# Altium PCB VSC_PCB.PcbDoc (part 1 of 2)
Units mil, origin at the board's own origin, x right, y up, seen from the top; angles counter-clockwise.
Board outline 9964.56 x 7010.83 mil, 4 copper layers (Top Layer, Regulator Voltage, Regulator GND, Bottom Layer), stack 23.756 mil thick; 128 components, 80 nets, 378 pads, 666 vias.
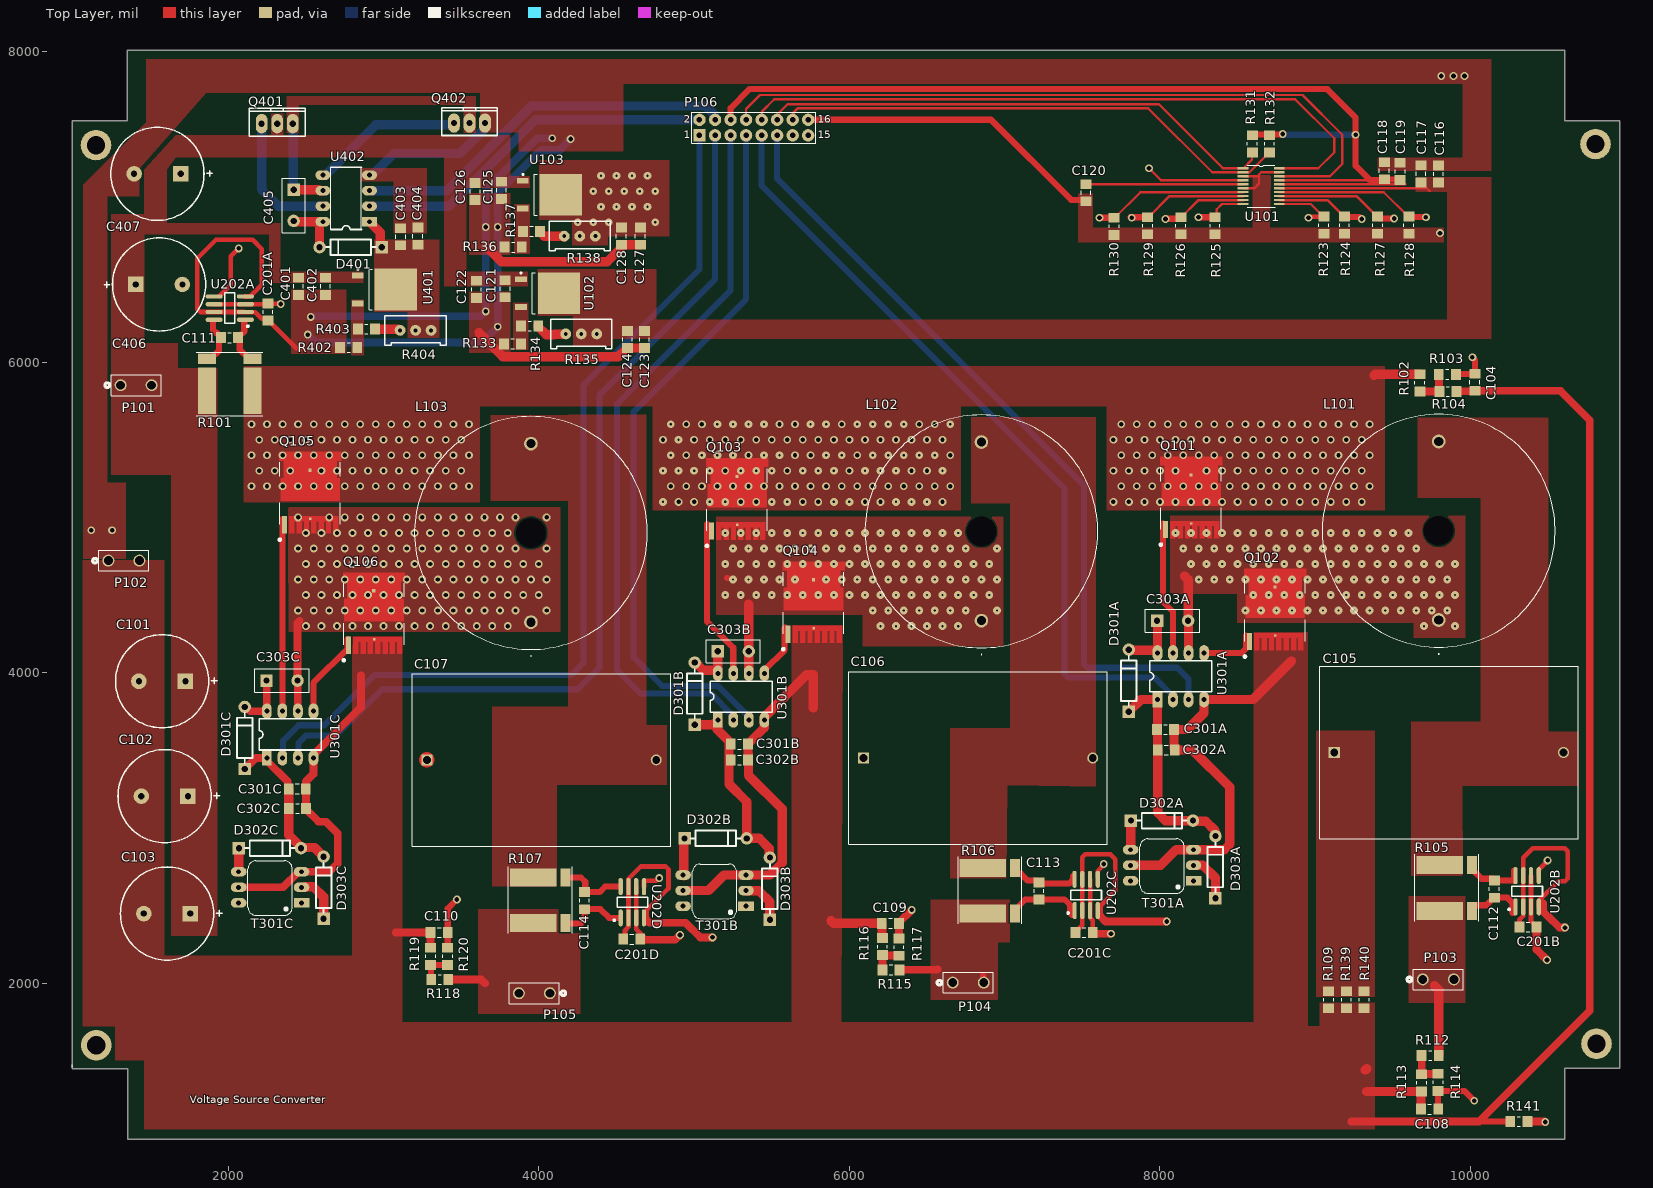
[diagram p0: Top Layer view]
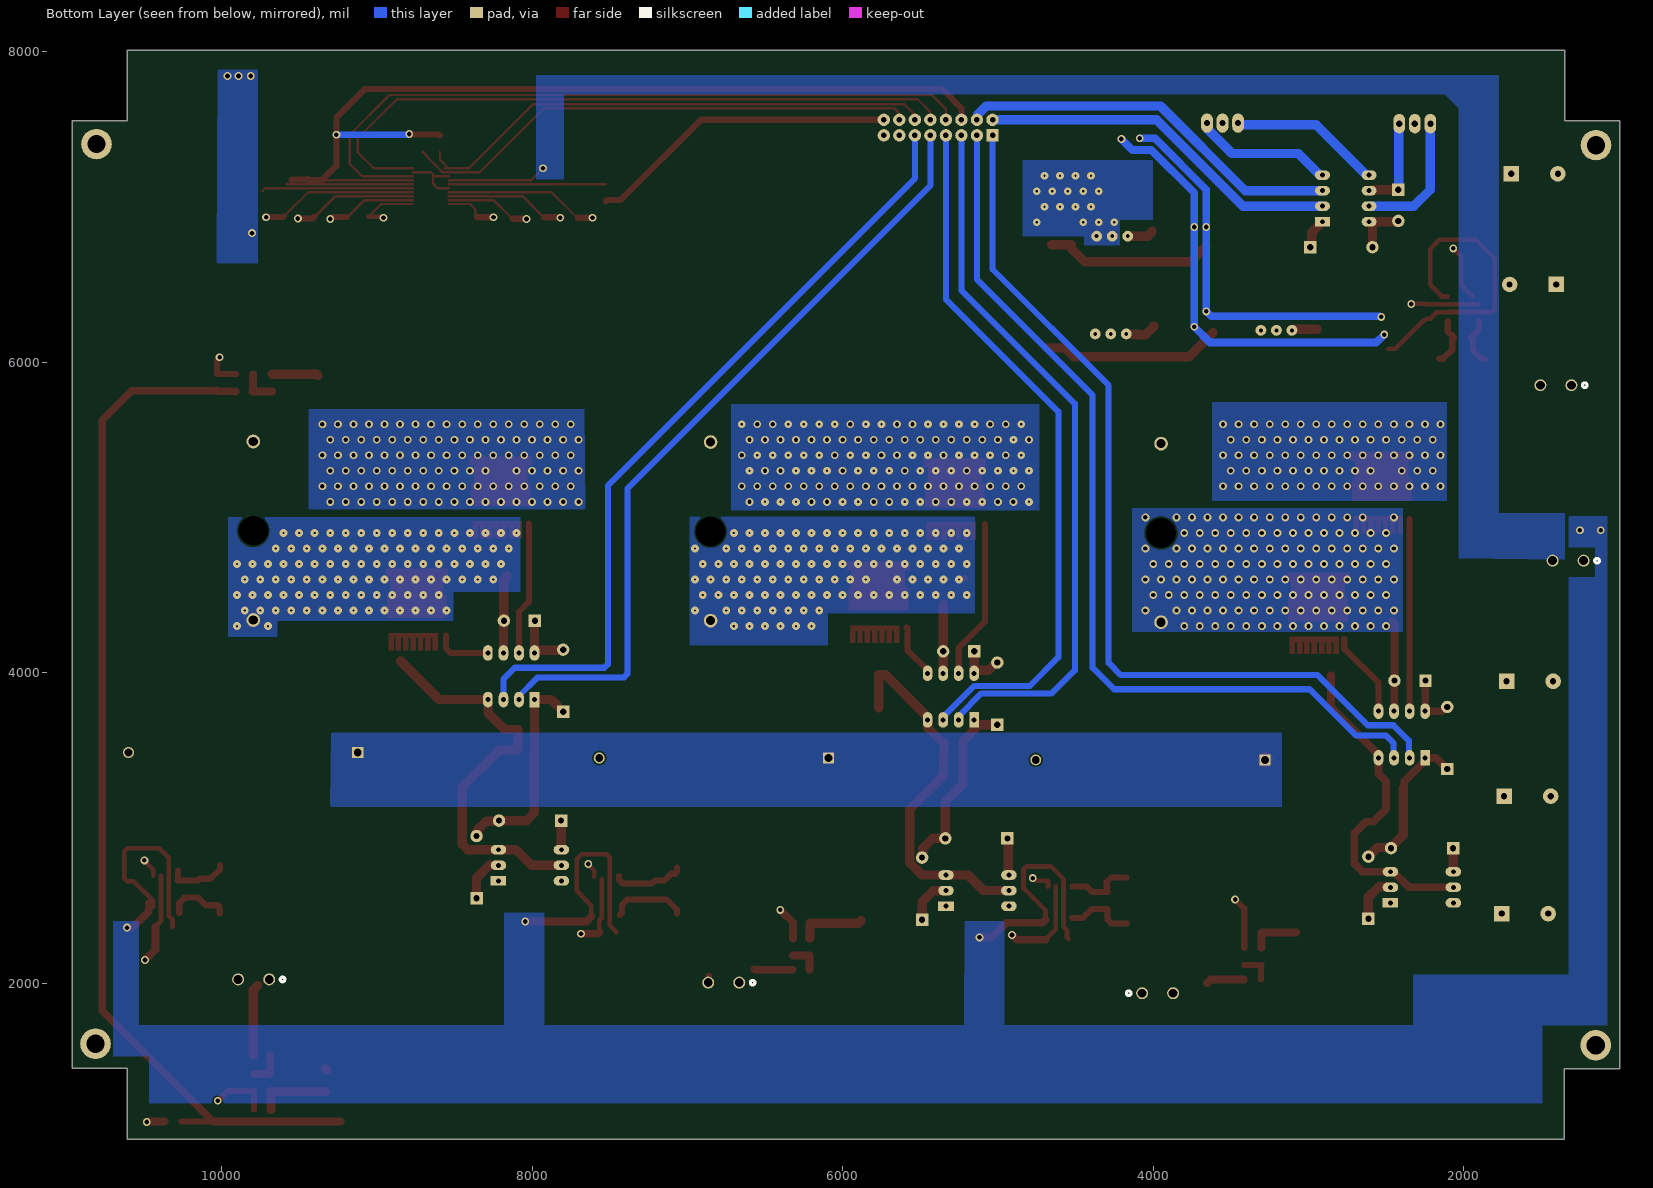
[diagram p1: Bottom Layer view, seen from below]
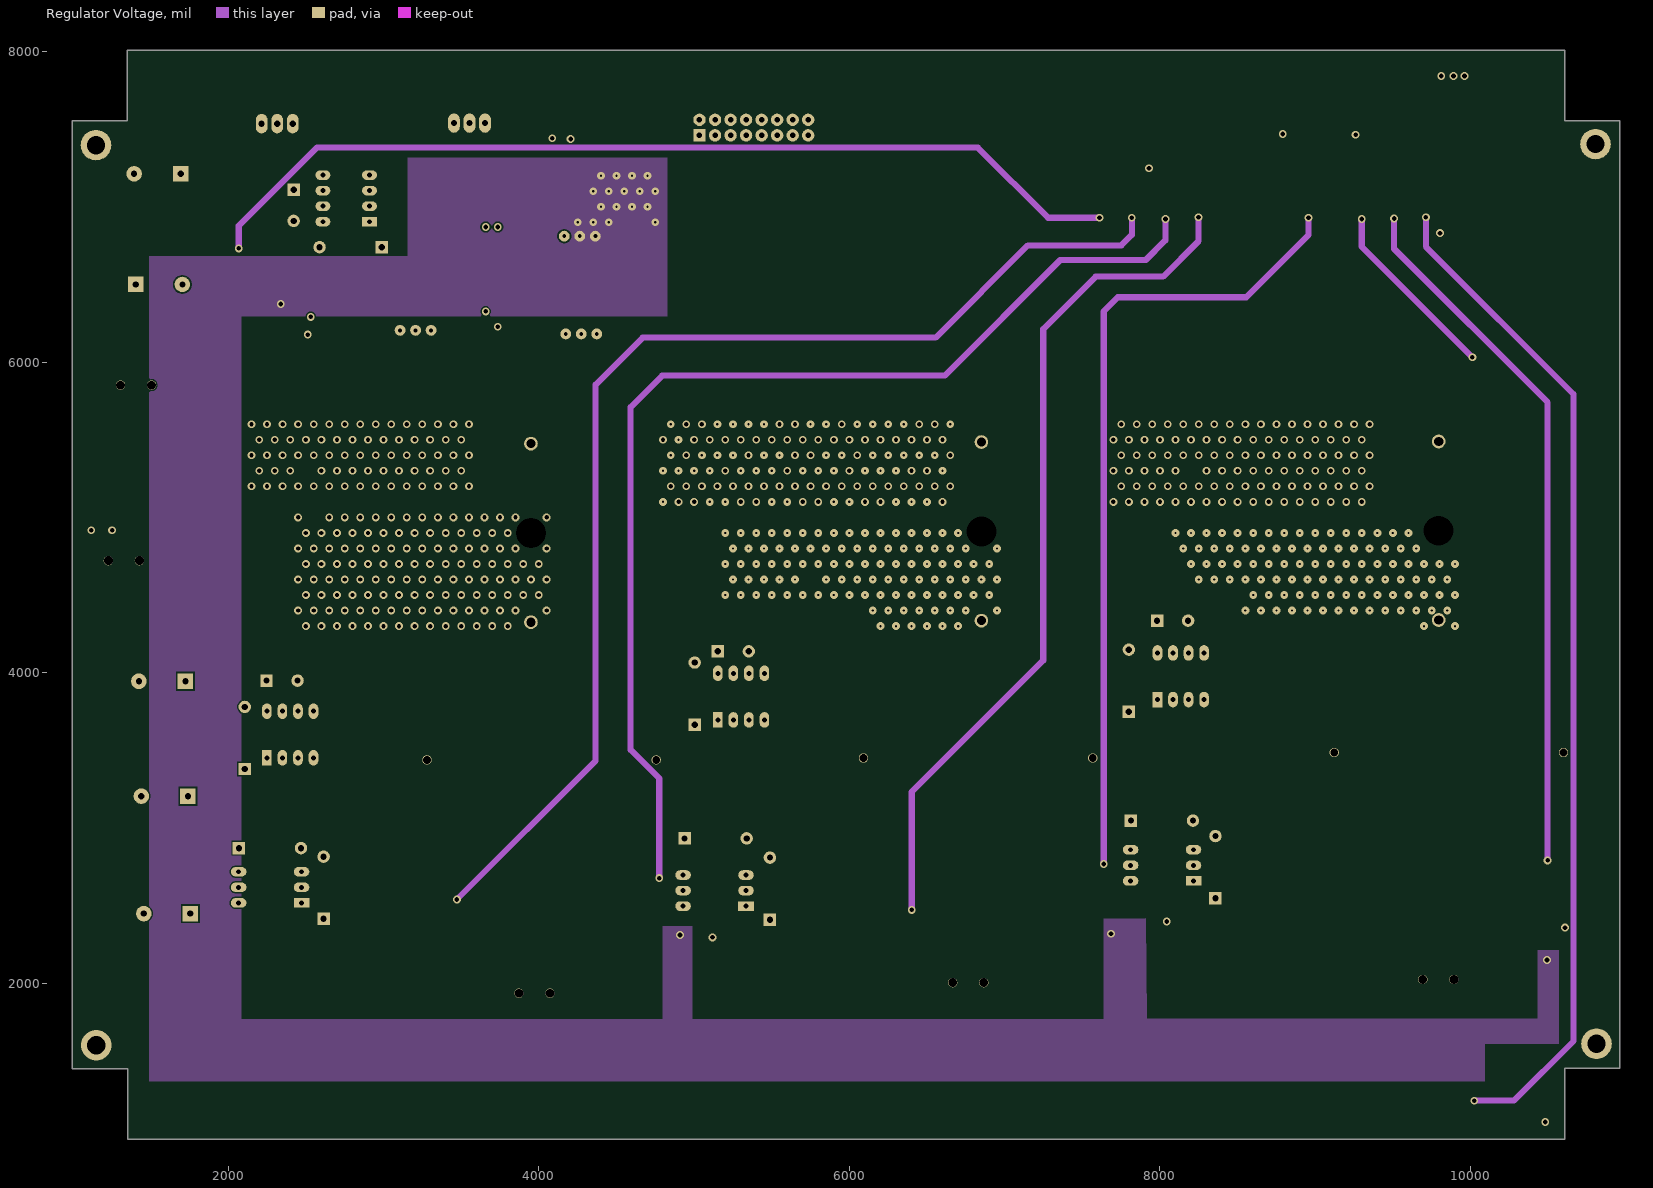
[diagram p2: Regulator Voltage]
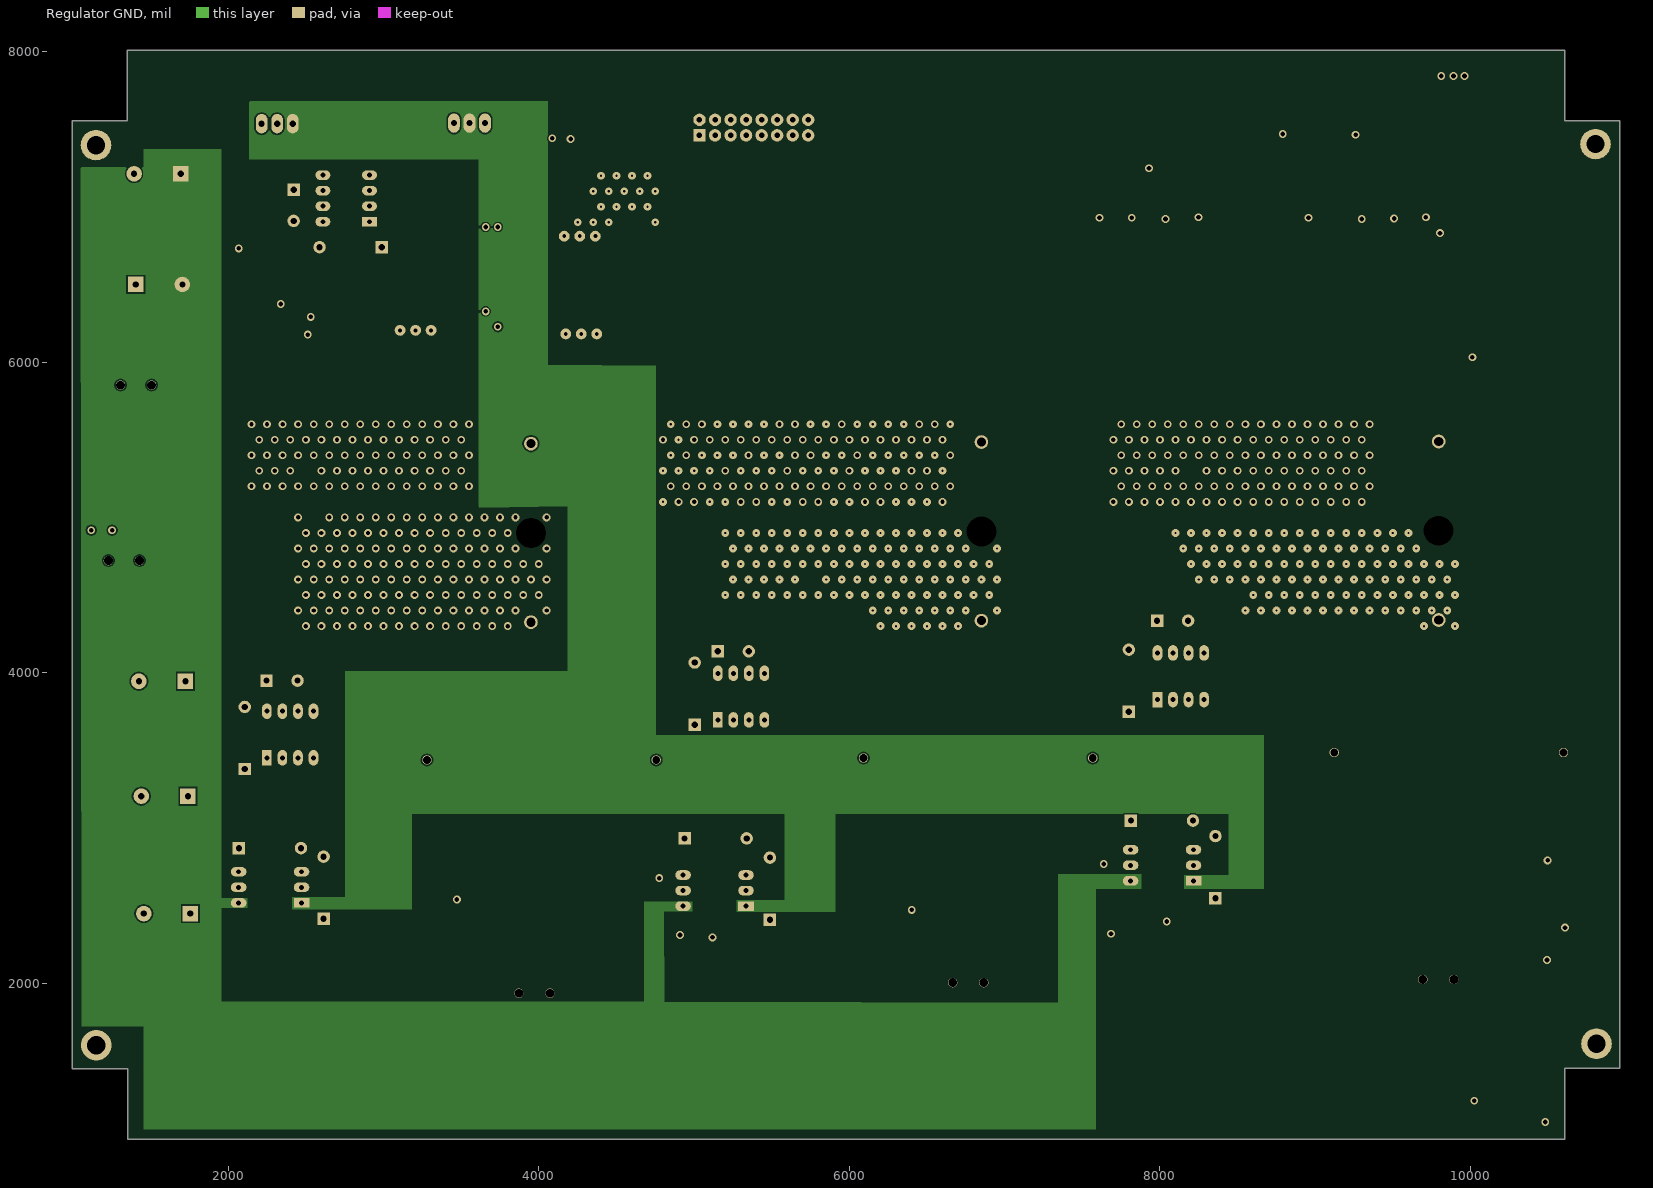
[diagram p3: Regulator GND]
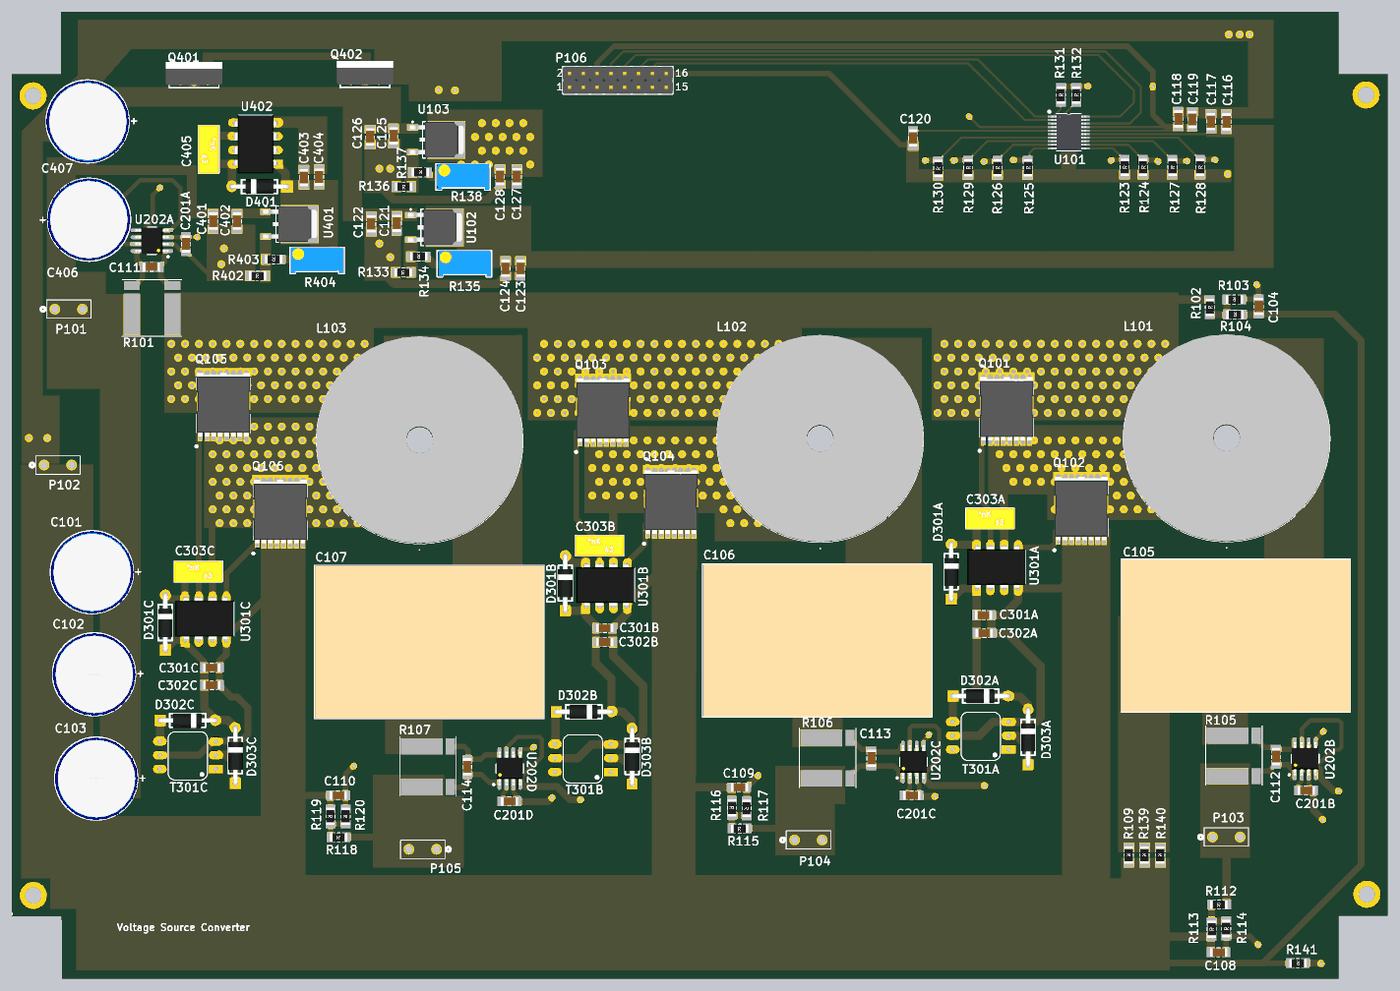
[diagram p5: 3D render of the assembled board from above, using the file's embedded part models]

## Layer stack, top to bottom
Top Solder: solder mask 0.4, Solder Resist, Dk 3.5
Top Layer: signal copper 1.4
Dielectric 6: prepreg 2.8, PP-006, Dk 4.1
Regulator Voltage: signal copper 1.378
Dielectric 1: dielectric 12.6, FR-4, Dk 4.8
Regulator GND: signal copper 1.378
Dielectric 7: prepreg 2.8, PP-006, Dk 4.1
Bottom Layer: signal copper 1.4
Bottom Solder: solder mask 0.4, Solder Resist, Dk 3.5

## Board outline
995.83,1449.8 995.83,7555.12 1350.16,7555.12 1349.17,8007.87 10606.3,8007.87 10606.3,7555.16 10960.39,7555.16 10960.39,1452.79 10606.06,1452.79 10606.06,997.29 10606.3,997.05 1354.09,997.05 1354.09,1449.8

## Design rules (kind name [scope] priority, off if disabled: settings)
Clearance "Stitching HS-3" [IsStitchingVia and InNet('HS-3') vs (IsVia and (Not IsStitchingVia)) Or IsPad] p1: gap=5 ignorepadtopadclearanceinfootprint=FALSE
Clearance Clearance_1 [InNamedPolygon('NONET_L01_P035')] p2: gap=10 ignorepadtopadclearanceinfootprint=TRUE
Clearance [All] p3: gap=10 ignorepadtopadclearanceinfootprint=TRUE
Height [All] p1: minheight=0 maxheight=10000 prefheight=500
HoleSize [All] p1: absolutevalues=TRUE maxlimit=393.7 minlimit=1 maxpercent=80.000 minpercent=20.000
PolygonConnect PolygonConnect_67 [All vs IsNamedPolygon('NONET_L06_P-001') Or IsNamedPolygon('NONET_L06_P-001') Or IsNamedPolygon('NONET_L06_P-001') Or IsNamedPolygon('NONET_L06_P-001') Or IsNamedPolygon('NONET_L06_P-001') Or IsNamedPolygon('NONET_L-01_P-001') Or IsNamedPolygon('NONET_L06_P-001') Or IsNamedPolygon('NONET_L06_P-001') Or IsNamedPolygon('NONET_L06_P-001') Or IsNamedPolygon('NONET_L06_P-001') Or IsNamedPolygon('NONET_L06_P-001') Or IsNamedPolygon('NONET_L-01_P-001') Or IsNamedPolygon('GND_L01_P084') Or IsNamedPolygon('HS-1_L01_P104') Or IsNamedPolygon('HS-2_L01_P099') Or IsNamedPolygon('HS-3_L01_P083') Or IsNamedPolygon('NETC105_2_L01_P112') Or IsNamedPolygon('NETC106_2_L01_P107') Or IsNamedPolygon('NETC107_2_L01_P088') Or IsNamedPolygon('NETP103_1_L01_P110') Or IsNamedPolygon('NETP104_1_L01_P108') Or IsNamedPolygon('NETP105_1_L01_P089') Or IsNamedPolygon('NETQ101_3_L01_P082') Or IsNamedPolygon('NONET_L-01_P-001') Or IsNamedPolygon('NONET_L-01_P-001') Or IsNamedPolygon('NONET_L-01_P-001') Or IsNamedPolygon('NONET_L-01_P-001') Or IsNamedPolygon('NONET_L-01_P-001') Or IsNamedPolygon('NONET_L-01_P-001') Or IsNamedPolygon('NONET_L-01_P-001') Or IsNamedPolygon('NONET_L-01_P-001') Or IsNamedPolygon('NONET_L-01_P-001') Or IsNamedPolygon('NONET_L-01_P-001') Or IsNamedPolygon('NONET_L-01_P-001') Or IsNamedPolygon('NONET_L-01_P-001') Or IsNamedPolygon('NONET_L-01_P-001') Or IsNamedPolygon('NONET_L-01_P-001') Or IsNamedPolygon('NONET_L-01_P-001') Or IsNamedPolygon('NONET_L-01_P-001') Or IsNamedPolygon('NONET_L-01_P-001') Or IsNamedPolygon('NONET_L-01_P-001') Or IsNamedPolygon('GND_L04_P115') Or IsNamedPolygon('HS-1_L04_P105') Or IsNamedPolygon('HS-2_L04_P100') Or IsNamedPolygon('HS-3_L04_P106') Or IsNamedPolygon('NETQ101_3_L04_P087') Or IsNamedPolygon('NETQ101_3_L04_P098') Or IsNamedPolygon('NETQ101_3_L04_P103') Or IsNamedPolygon('NONET_L-01_P-001') Or IsNamedPolygon('NONET_L-01_P-001') Or IsNamedPolygon('NONET_L-01_P-001') Or IsNamedPolygon('NONET_L-01_P-001')] p1: connectstyle=Direct reliefconductorwidth=10 reliefentries=4 polygonreliefangle="90 Angle" airgapwidth=10
PolygonConnect PolygonConnect_66 [All vs IsNamedPolygon('NONET_L06_P-001') Or IsNamedPolygon('NONET_L06_P-001') Or IsNamedPolygon('NONET_L06_P-001') Or IsNamedPolygon('NONET_L06_P-001') Or IsNamedPolygon('NONET_L06_P-001') Or IsNamedPolygon('NONET_L-01_P-001') Or IsNamedPolygon('NONET_L06_P-001') Or IsNamedPolygon('NONET_L06_P-001') Or IsNamedPolygon('NONET_L06_P-001') Or IsNamedPolygon('NONET_L06_P-001') Or IsNamedPolygon('NONET_L06_P-001') Or IsNamedPolygon('NONET_L-01_P-001') Or IsNamedPolygon('GND_L01_P084') Or IsNamedPolygon('HS-1_L01_P104') Or IsNamedPolygon('HS-2_L01_P099') Or IsNamedPolygon('HS-3_L01_P083') Or IsNamedPolygon('NETC105_2_L01_P112') Or IsNamedPolygon('NETC106_2_L01_P107') Or IsNamedPolygon('NETC107_2_L01_P088') Or IsNamedPolygon('NETP103_1_L01_P110') Or IsNamedPolygon('NETP104_1_L01_P108') Or IsNamedPolygon('NETP105_1_L01_P089') Or IsNamedPolygon('NETQ101_3_L01_P082') Or IsNamedPolygon('NONET_L-01_P-001') Or IsNamedPolygon('NONET_L-01_P-001') Or IsNamedPolygon('NONET_L-01_P-001') Or IsNamedPolygon('NONET_L-01_P-001') Or IsNamedPolygon('NONET_L-01_P-001') Or IsNamedPolygon('NONET_L-01_P-001') Or IsNamedPolygon('NONET_L-01_P-001') Or IsNamedPolygon('NONET_L-01_P-001') Or IsNamedPolygon('NONET_L-01_P-001') Or IsNamedPolygon('NONET_L-01_P-001') Or IsNamedPolygon('NONET_L-01_P-001') Or IsNamedPolygon('NONET_L-01_P-001') Or IsNamedPolygon('NONET_L-01_P-001') Or IsNamedPolygon('NONET_L-01_P-001') Or IsNamedPolygon('NONET_L-01_P-001') Or IsNamedPolygon('NONET_L-01_P-001') Or IsNamedPolygon('NONET_L-01_P-001') Or IsNamedPolygon('NONET_L-01_P-001') Or IsNamedPolygon('GND_L04_P115') Or IsNamedPolygon('HS-1_L04_P105') Or IsNamedPolygon('HS-2_L04_P100') Or IsNamedPolygon('HS-3_L04_P106') Or IsNamedPolygon('NETQ101_3_L04_P087') Or IsNamedPolygon('NETQ101_3_L04_P098') Or IsNamedPolygon('NETQ101_3_L04_P103') Or IsNamedPolygon('NONET_L-01_P-001') Or IsNamedPolygon('NONET_L-01_P-001') Or IsNamedPolygon('NONET_L-01_P-001') Or IsNamedPolygon('NONET_L-01_P-001')] p2: connectstyle=Direct reliefconductorwidth=10 reliefentries=4 polygonreliefangle="90 Angle" airgapwidth=10
PolygonConnect PolygonConnect_65 [All vs IsNamedPolygon('NONET_L06_P-001') Or IsNamedPolygon('NONET_L06_P-001') Or IsNamedPolygon('NONET_L06_P-001') Or IsNamedPolygon('NONET_L06_P-001') Or IsNamedPolygon('NONET_L06_P-001') Or IsNamedPolygon('NONET_L-01_P-001') Or IsNamedPolygon('NONET_L06_P-001') Or IsNamedPolygon('NONET_L06_P-001') Or IsNamedPolygon('NONET_L06_P-001') Or IsNamedPolygon('NONET_L06_P-001') Or IsNamedPolygon('NONET_L06_P-001') Or IsNamedPolygon('NONET_L-01_P-001') Or IsNamedPolygon('NONET_L01_P062') Or IsNamedPolygon('GND_L01_P084') Or IsNamedPolygon('GND_L01_P096') Or IsNamedPolygon('GND_L01_P097') Or IsNamedPolygon('HS-1_L01_P104') Or IsNamedPolygon('HS-2_L01_P099') Or IsNamedPolygon('HS-3_L01_P083') Or IsNamedPolygon('HS-3_L01_P101') Or IsNamedPolygon('NETC105_2_L01_P112') Or IsNamedPolygon('NETC106_2_L01_P107') Or IsNamedPolygon('NETP103_1_L01_P110') Or IsNamedPolygon('NETP104_1_L01_P108') Or IsNamedPolygon('NETP105_1_L01_P089') Or IsNamedPolygon('NETQ101_3_L01_P082') Or IsNamedPolygon('NETC107_2_L01_P088') Or IsNamedPolygon('NONET_L-01_P-001') Or IsNamedPolygon('NONET_L-01_P-001') Or IsNamedPolygon('NONET_L-01_P-001') Or IsNamedPolygon('NONET_L-01_P-001') Or IsNamedPolygon('NONET_L-01_P-001') Or IsNamedPolygon('NONET_L-01_P-001') Or IsNamedPolygon('NONET_L-01_P-001') Or IsNamedPolygon('NONET_L-01_P-001') Or IsNamedPolygon('NONET_L-01_P-001') Or IsNamedPolygon('NONET_L-01_P-001') Or IsNamedPolygon('NONET_L-01_P-001') Or IsNamedPolygon('NONET_L-01_P-001') Or IsNamedPolygon('NONET_L-01_P-001') Or IsNamedPolygon('NONET_L02_P068') Or IsNamedPolygon('NONET_L02_P069') Or IsNamedPolygon('GND_L06_P115') Or IsNamedPolygon('HS-1_L06_P105') Or IsNamedPolygon('HS-2_L06_P100') Or IsNamedPolygon('HS-3_L06_P106') Or IsNamedPolygon('NETP103_1_L06_P111') Or IsNamedPolygon('NETP104_1_L06_P109') Or IsNamedPolygon('NETP105_1_L06_P090') Or IsNamedPolygon('NETQ101_3_L06_P087') Or IsNamedPolygon('NETQ101_3_L06_P098') Or IsNamedPolygon('NETQ101_3_L06_P103') Or IsNamedPolygon('NONET_L-01_P-001')] p3: connectstyle=Direct reliefconductorwidth=10 reliefentries=4 polygonreliefangle="90 Angle" airgapwidth=10
PolygonConnect PolygonConnect_64 [All vs IsNamedPolygon('NONET_L06_P-001') Or IsNamedPolygon('NONET_L06_P-001') Or IsNamedPolygon('NONET_L06_P-001') Or IsNamedPolygon('NONET_L06_P-001') Or IsNamedPolygon('NONET_L06_P-001') Or IsNamedPolygon('NONET_L-01_P-001') Or IsNamedPolygon('NONET_L06_P-001') Or IsNamedPolygon('NONET_L06_P-001') Or IsNamedPolygon('NONET_L06_P-001') Or IsNamedPolygon('NONET_L06_P-001') Or IsNamedPolygon('NONET_L06_P-001') Or IsNamedPolygon('NONET_L-01_P-001') Or IsNamedPolygon('+48_L01_P040') Or IsNamedPolygon('NONET_L01_P062') Or IsNamedPolygon('+48_L01_P071') Or IsNamedPolygon('GND_L01_P084') Or IsNamedPolygon('GND_L01_P086') Or IsNamedPolygon('GND_L01_P096') Or IsNamedPolygon('GND_L01_P097') Or IsNamedPolygon('HS-1_L01_P104') Or IsNamedPolygon('HS-2_L01_P099') Or IsNamedPolygon('HS-3_L01_P083') Or IsNamedPolygon('HS-3_L01_P101') Or IsNamedPolygon('NETC105_2_L01_P110') Or IsNamedPolygon('NETC106_2_L01_P108') Or IsNamedPolygon('NETC107_2_L01_P089') Or IsNamedPolygon('NETL101_2_L01_P112') Or IsNamedPolygon('NETL102_2_L01_P107') Or IsNamedPolygon('NETL103_2_L01_P088') Or IsNamedPolygon('NETQ101_3_L01_P082') Or IsNamedPolygon('NETQ101_3_L01_P102') Or IsNamedPolygon('NONET_L02_P068') Or IsNamedPolygon('NONET_L02_P069') Or IsNamedPolygon('+12_L02_P070') Or IsNamedPolygon('GND_L05_P061') Or IsNamedPolygon('+48_L06_P114') Or IsNamedPolygon('GND_L06_P115') Or IsNamedPolygon('HS-1_L06_P105') Or IsNamedPolygon('HS-2_L06_P100') Or IsNamedPolygon('HS-3_L06_P106') Or IsNamedPolygon('NETC105_2_L06_P111') Or IsNamedPolygon('NETC106_2_L06_P109') Or IsNamedPolygon('NETC107_2_L06_P090') Or IsNamedPolygon('NETQ101_3_L06_P087') Or IsNamedPolygon('NETQ101_3_L06_P098') Or IsNamedPolygon('NETQ101_3_L06_P103')] p4: connectstyle=Direct reliefconductorwidth=10 reliefentries=4 polygonreliefangle="90 Angle" airgapwidth=10
PolygonConnect PolygonConnect_63 [All vs IsNamedPolygon('NONET_L06_P-001') Or IsNamedPolygon('NONET_L06_P-001') Or IsNamedPolygon('NONET_L06_P-001') Or IsNamedPolygon('NONET_L06_P-001') Or IsNamedPolygon('NONET_L06_P-001') Or IsNamedPolygon('NONET_L-01_P-001') Or IsNamedPolygon('NONET_L06_P-001') Or IsNamedPolygon('NONET_L06_P-001') Or IsNamedPolygon('NONET_L06_P-001') Or IsNamedPolygon('NONET_L06_P-001') Or IsNamedPolygon('NONET_L06_P-001') Or IsNamedPolygon('NONET_L-01_P-001') Or IsNamedPolygon('+48_L01_P040') Or IsNamedPolygon('NONET_L01_P062') Or IsNamedPolygon('+48_L01_P071') Or IsNamedPolygon('GND_L01_P084') Or IsNamedPolygon('GND_L01_P086') Or IsNamedPolygon('GND_L01_P096') Or IsNamedPolygon('GND_L01_P097') Or IsNamedPolygon('HS-1_L01_P104') Or IsNamedPolygon('HS-2_L01_P099') Or IsNamedPolygon('HS-3_L01_P083') Or IsNamedPolygon('HS-3_L01_P101') Or IsNamedPolygon('NETC105_2_L01_P110') Or IsNamedPolygon('NETC106_2_L01_P108') Or IsNamedPolygon('NETC107_2_L01_P089') Or IsNamedPolygon('NETL101_2_L01_P112') Or IsNamedPolygon('NETL102_2_L01_P107') Or IsNamedPolygon('NETL103_2_L01_P088') Or IsNamedPolygon('NETQ101_3_L01_P082') Or IsNamedPolygon('NETQ101_3_L01_P102') Or IsNamedPolygon('NONET_L02_P068') Or IsNamedPolygon('NONET_L02_P069') Or IsNamedPolygon('+12_L02_P070') Or IsNamedPolygon('GND_L05_P061') Or IsNamedPolygon('+48_L06_P114') Or IsNamedPolygon('GND_L06_P115') Or IsNamedPolygon('HS-1_L06_P105') Or IsNamedPolygon('HS-2_L06_P100') Or IsNamedPolygon('HS-3_L06_P106') Or IsNamedPolygon('NETC105_2_L06_P111') Or IsNamedPolygon('NETC106_2_L06_P109') Or IsNamedPolygon('NETC107_2_L06_P090') Or IsNamedPolygon('NETQ101_3_L06_P087') Or IsNamedPolygon('NETQ101_3_L06_P098') Or IsNamedPolygon('NETQ101_3_L06_P103')] p5: connectstyle=Direct reliefconductorwidth=10 reliefentries=4 polygonreliefangle="90 Angle" airgapwidth=10
PolygonConnect PolygonConnect_62 [All vs IsNamedPolygon('+48_L06_P114')] p6: connectstyle=Direct reliefconductorwidth=10 reliefentries=4 polygonreliefangle="90 Angle" airgapwidth=10
PolygonConnect PolygonConnect_61 [All vs IsNamedPolygon('+48_L06_P113')] p7: connectstyle=Direct reliefconductorwidth=10 reliefentries=4 polygonreliefangle="90 Angle" airgapwidth=10
PolygonConnect PolygonConnect_60 [All vs IsNamedPolygon('NONET_L06_P-001') Or IsNamedPolygon('NONET_L06_P-001') Or IsNamedPolygon('NONET_L06_P-001') Or IsNamedPolygon('NONET_L06_P-001') Or IsNamedPolygon('NONET_L06_P-001') Or IsNamedPolygon('NONET_L-01_P-001') Or IsNamedPolygon('NONET_L06_P-001') Or IsNamedPolygon('NONET_L06_P-001') Or IsNamedPolygon('NONET_L06_P-001') Or IsNamedPolygon('NONET_L06_P-001') Or IsNamedPolygon('NONET_L-01_P-001') Or IsNamedPolygon('+48_L01_P040') Or IsNamedPolygon('NONET_L01_P062') Or IsNamedPolygon('+48_L01_P071') Or IsNamedPolygon('GND_L01_P084') Or IsNamedPolygon('GND_L01_P086') Or IsNamedPolygon('GND_L01_P096') Or IsNamedPolygon('GND_L01_P097') Or IsNamedPolygon('HS-1_L01_P104') Or IsNamedPolygon('HS-2_L01_P099') Or IsNamedPolygon('HS-3_L01_P083') Or IsNamedPolygon('HS-3_L01_P101') Or IsNamedPolygon('NETC105_2_L01_P110') Or IsNamedPolygon('NETC106_2_L01_P108') Or IsNamedPolygon('NETC107_2_L01_P089') Or IsNamedPolygon('NETL101_2_L01_P112') Or IsNamedPolygon('NETL102_2_L01_P107') Or IsNamedPolygon('NETL103_2_L01_P088') Or IsNamedPolygon('NETQ101_3_L01_P082') Or IsNamedPolygon('NETQ101_3_L01_P102') Or IsNamedPolygon('NONET_L02_P068') Or IsNamedPolygon('NONET_L02_P069') Or IsNamedPolygon('+12_L02_P070') Or IsNamedPolygon('GND_L05_P061') Or IsNamedPolygon('HS-1_L06_P105') Or IsNamedPolygon('HS-2_L06_P100') Or IsNamedPolygon('HS-3_L06_P106') Or IsNamedPolygon('NETC105_2_L06_P111') Or IsNamedPolygon('NETC106_2_L06_P109') Or IsNamedPolygon('NETC107_2_L06_P090') Or IsNamedPolygon('NETQ101_3_L06_P087') Or IsNamedPolygon('NETQ101_3_L06_P098') Or IsNamedPolygon('NETQ101_3_L06_P103')] p8: connectstyle=Direct reliefconductorwidth=10 reliefentries=4 polygonreliefangle="90 Angle" airgapwidth=10
PolygonConnect PolygonConnect_59 [All vs IsNamedPolygon('NETC105_2_L06_P111')] p9: connectstyle=Direct reliefconductorwidth=10 reliefentries=4 polygonreliefangle="90 Angle" airgapwidth=10
PolygonConnect PolygonConnect_58 [All vs IsNamedPolygon('NETC105_2_L01_P110')] p10: connectstyle=Direct reliefconductorwidth=10 reliefentries=4 polygonreliefangle="90 Angle" airgapwidth=10
PolygonConnect PolygonConnect_57 [All vs IsNamedPolygon('NETQ101_3_L01_P102')] p11: connectstyle=Direct reliefconductorwidth=10 reliefentries=4 polygonreliefangle="90 Angle" airgapwidth=10
PolygonConnect PolygonConnect_56 [All vs IsNamedPolygon('NETC106_2_L06_P109')] p12: connectstyle=Direct reliefconductorwidth=10 reliefentries=4 polygonreliefangle="90 Angle" airgapwidth=10
PolygonConnect PolygonConnect_55 [All vs IsNamedPolygon('NETC106_2_L01_P108')] p13: connectstyle=Direct reliefconductorwidth=10 reliefentries=4 polygonreliefangle="90 Angle" airgapwidth=10
PolygonConnect PolygonConnect_54 [All vs IsNamedPolygon('HS-2_L06_P100')] p14: connectstyle=Direct reliefconductorwidth=10 reliefentries=4 polygonreliefangle="90 Angle" airgapwidth=10
PolygonConnect PolygonConnect_53 [All vs IsNamedPolygon('HS-2_L06_P100')] p15: connectstyle=Direct reliefconductorwidth=10 reliefentries=4 polygonreliefangle="90 Angle" airgapwidth=10
PolygonConnect PolygonConnect_52 [All vs IsNamedPolygon('HS-2_L06_P100')] p16: connectstyle=Direct reliefconductorwidth=10 reliefentries=4 polygonreliefangle="90 Angle" airgapwidth=10
PolygonConnect PolygonConnect_51 [All vs IsNamedPolygon('HS-1_L06_P105')] p17: connectstyle=Direct reliefconductorwidth=10 reliefentries=4 polygonreliefangle="90 Angle" airgapwidth=10
PolygonConnect PolygonConnect_50 [All vs IsNamedPolygon('HS-2_L01_P099')] p18: connectstyle=Direct reliefconductorwidth=10 reliefentries=4 polygonreliefangle="90 Angle" airgapwidth=10
PolygonConnect PolygonConnect_49 [All vs IsNamedPolygon('HS-3_L01_P101')] p19: connectstyle=Direct reliefconductorwidth=10 reliefentries=4 polygonreliefangle="90 Angle" airgapwidth=10
PolygonConnect PolygonConnect_48 [All vs IsNamedPolygon('HS-3_L01_P083')] p20: connectstyle=Direct reliefconductorwidth=10 reliefentries=4 polygonreliefangle="90 Angle" airgapwidth=10
PolygonConnect PolygonConnect_47 [All vs IsNamedPolygon('HS-1_L01_P104')] p21: connectstyle=Direct reliefconductorwidth=10 reliefentries=4 polygonreliefangle="90 Angle" airgapwidth=10
PolygonConnect PolygonConnect_46 [All vs IsNamedPolygon('NONET_L-01_P-001') Or IsNamedPolygon('NONET_L-01_P-001') Or IsNamedPolygon('+48_L01_P040') Or IsNamedPolygon('NONET_L01_P062') Or IsNamedPolygon('+48_L01_P071') Or IsNamedPolygon('GND_L01_P084') Or IsNamedPolygon('GND_L01_P086') Or IsNamedPolygon('GND_L01_P096') Or IsNamedPolygon('GND_L01_P097') Or IsNamedPolygon('HS-3_L01_P083') Or IsNamedPolygon('NETC107_2_L01_P089') Or IsNamedPolygon('NETL103_2_L01_P088') Or IsNamedPolygon('NETQ101_3_L01_P082') Or IsNamedPolygon('NONET_L02_P068') Or IsNamedPolygon('NONET_L02_P069') Or IsNamedPolygon('+12_L02_P070') Or IsNamedPolygon('GND_L05_P061') Or IsNamedPolygon('HS-3_L06_P091') Or IsNamedPolygon('NETC107_2_L06_P090') Or IsNamedPolygon('NETQ101_3_L06_P087') Or IsNamedPolygon('NETQ101_3_L06_P098')] p22: connectstyle=Direct reliefconductorwidth=10 reliefentries=4 polygonreliefangle="90 Angle" airgapwidth=10
PolygonConnect PolygonConnect_45 [All vs IsNamedPolygon('NONET_L01_P040') Or IsNamedPolygon('NONET_L01_P062') Or IsNamedPolygon('NONET_L01_P071') Or IsNamedPolygon('GND_L01_P027') Or IsNamedPolygon('GND_L01_P058') Or IsNamedPolygon('GND_L01_P080') Or IsNamedPolygon('NONET_L01_P084') Or IsNamedPolygon('NONET_L01_P086') Or IsNamedPolygon('HS-1_L01_P054') Or IsNamedPolygon('HS-1_L01_P055') Or IsNamedPolygon('HS-2_L01_P038') Or IsNamedPolygon('NONET_L01_P035') Or IsNamedPolygon('NONET_L01_P083') Or IsNamedPolygon('NONET_L01_P024') Or IsNamedPolygon('NETQ101_3_L01_P037') Or IsNamedPolygon('NONET_L01_P082') Or IsNamedPolygon('NONET_L02_P068') Or IsNamedPolygon('NONET_L02_P069') Or IsNamedPolygon('NONET_L02_P070') Or IsNamedPolygon('GND_L05_P061') Or IsNamedPolygon('NONET_L06_P079') Or IsNamedPolygon('HS-1_L06_P076') Or IsNamedPolygon('HS-1_L06_P077') Or IsNamedPolygon('HS-1_L06_P078') Or IsNamedPolygon('HS-2_L06_P073') Or IsNamedPolygon('HS-2_L06_P074') Or IsNamedPolygon('HS-2_L06_P075') Or IsNamedPolygon('HS-3_L06_P050') Or IsNamedPolygon('HS-3_L06_P059') Or IsNamedPolygon('HS-3_L06_P060')] p23: connectstyle=Direct reliefconductorwidth=10 reliefentries=4 polygonreliefangle="90 Angle" airgapwidth=10
PolygonConnect PolygonConnect_44 [All vs IsNamedPolygon('GND_L01_P080')] p24: connectstyle=Direct reliefconductorwidth=10 reliefentries=4 polygonreliefangle="90 Angle" airgapwidth=10
PolygonConnect PolygonConnect_43 [All vs IsNamedPolygon('HS-1_L06_P078')] p25: connectstyle=Direct reliefconductorwidth=10 reliefentries=4 polygonreliefangle="90 Angle" airgapwidth=10
PolygonConnect PolygonConnect_42 [All vs IsNamedPolygon('HS-1_L06_P077')] p26: connectstyle=Direct reliefconductorwidth=10 reliefentries=4 polygonreliefangle="90 Angle" airgapwidth=10
PolygonConnect PolygonConnect_41 [All vs IsNamedPolygon('HS-2_L06_P074')] p27: connectstyle=Direct reliefconductorwidth=10 reliefentries=4 polygonreliefangle="90 Angle" airgapwidth=10
PolygonConnect PolygonConnect_40 [All vs IsNamedPolygon('HS-2_L06_P073')] p28: connectstyle=Direct reliefconductorwidth=10 reliefentries=4 polygonreliefangle="90 Angle" airgapwidth=10
PolygonConnect PolygonConnect_39 [All vs IsNamedPolygon('NONET_L01_P071')] p29: connectstyle=Direct reliefconductorwidth=10 reliefentries=4 polygonreliefangle="90 Angle" airgapwidth=10
PolygonConnect PolygonConnect_38 [All vs IsNamedPolygon('NONET_L01_P062')] p30: connectstyle=Direct reliefconductorwidth=10 reliefentries=4 polygonreliefangle="90 Angle" airgapwidth=10
PolygonConnect PolygonConnect_37 [All vs IsNamedPolygon('NONET_L02_P068')] p31: connectstyle=Direct reliefconductorwidth=10 reliefentries=4 polygonreliefangle="90 Angle" airgapwidth=10
PolygonConnect PolygonConnect_36 [All vs IsNamedPolygon('+10_L02_P064')] p32: connectstyle=Direct reliefconductorwidth=10 reliefentries=4 polygonreliefangle="90 Angle" airgapwidth=10
PolygonConnect PolygonConnect_35 [All vs IsNamedPolygon('GND_L05_P061')] p33: connectstyle=Direct reliefconductorwidth=10 reliefentries=4 polygonreliefangle="90 Angle" airgapwidth=10
PolygonConnect PolygonConnect_34 [All vs IsNamedPolygon('NONET_L01_P058')] p34: connectstyle=Direct reliefconductorwidth=10 reliefentries=4 polygonreliefangle="90 Angle" airgapwidth=10
PolygonConnect PolygonConnect_33 [All vs IsNamedPolygon('HS-1_L01_P055')] p35: connectstyle=Direct reliefconductorwidth=10 reliefentries=4 polygonreliefangle="90 Angle" airgapwidth=10
PolygonConnect PolygonConnect_32 [All vs IsNamedPolygon('HS-1_L01_P054')] p36: connectstyle=Direct reliefconductorwidth=10 reliefentries=4 polygonreliefangle="90 Angle" airgapwidth=10
PolygonConnect PolygonConnect_31 [All vs IsNamedPolygon('NONET_L01_P035')] p37: connectstyle=Direct reliefconductorwidth=10 reliefentries=4 polygonreliefangle="90 Angle" airgapwidth=10
PolygonConnect PolygonConnect_30 [All vs IsNamedPolygon('NONET_L01_P040')] p38: connectstyle=Direct reliefconductorwidth=10 reliefentries=4 polygonreliefangle="90 Angle" airgapwidth=10
PolygonConnect PolygonConnect_29 [All vs IsNamedPolygon('HS-3_L06_P053')] p39: connectstyle=Direct reliefconductorwidth=10 reliefentries=4 polygonreliefangle="90 Angle" airgapwidth=10
PolygonConnect PolygonConnect_28 [All vs IsNamedPolygon('GND_L01_P052')] p40: connectstyle=Direct reliefconductorwidth=10 reliefentries=4 polygonreliefangle="90 Angle" airgapwidth=10
PolygonConnect PolygonConnect_27 [All vs IsNamedPolygon('GND_L01_P051')] p41: connectstyle=Direct reliefconductorwidth=10 reliefentries=4 polygonreliefangle="90 Angle" airgapwidth=10
PolygonConnect PolygonConnect_26 [All vs IsNamedPolygon('HS-3_L06_P050')] p42: connectstyle=Direct reliefconductorwidth=10 reliefentries=4 polygonreliefangle="90 Angle" airgapwidth=10
PolygonConnect PolygonConnect_25 [All vs IsNamedPolygon('GND_L01_P049')] p43: connectstyle=Direct reliefconductorwidth=10 reliefentries=4 polygonreliefangle="90 Angle" airgapwidth=10
PolygonConnect PolygonConnect_24 [All vs IsNamedPolygon('GND_L01_P047')] p44: connectstyle=Direct reliefconductorwidth=10 reliefentries=4 polygonreliefangle="90 Angle" airgapwidth=10
PolygonConnect PolygonConnect_23 [All vs IsNamedPolygon('GND_L01_P045')] p45: connectstyle=Direct reliefconductorwidth=10 reliefentries=4 polygonreliefangle="90 Angle" airgapwidth=10
PolygonConnect PolygonConnect_22 [All vs IsNamedPolygon('GND_L01_P044')] p46: connectstyle=Direct reliefconductorwidth=10 reliefentries=4 polygonreliefangle="90 Angle" airgapwidth=10
PolygonConnect PolygonConnect_21 [All vs IsNamedPolygon('GND_L01_P043')] p47: connectstyle=Direct reliefconductorwidth=10 reliefentries=4 polygonreliefangle="90 Angle" airgapwidth=10
PolygonConnect PolygonConnect_20 [All vs IsNamedPolygon('NONET_L01_P040')] p48: connectstyle=Direct reliefconductorwidth=10 reliefentries=4 polygonreliefangle="90 Angle" airgapwidth=10
PolygonConnect PolygonConnect_19 [All vs IsNamedPolygon('+48_L01_P039')] p49: connectstyle=Direct reliefconductorwidth=10 reliefentries=4 polygonreliefangle="90 Angle" airgapwidth=10
PolygonConnect PolygonConnect_18 [All vs IsNamedPolygon('HS-2_L01_P038')] p50: connectstyle=Direct reliefconductorwidth=10 reliefentries=4 polygonreliefangle="90 Angle" airgapwidth=10
PolygonConnect PolygonConnect_17 [All vs IsNamedPolygon('NONET_L01_P035')] p51: connectstyle=Direct reliefconductorwidth=10 reliefentries=4 polygonreliefangle="90 Angle" airgapwidth=10
PolygonConnect PolygonConnect_16 [All vs IsNamedPolygon('+10D_L01_P034')] p52: connectstyle=Direct reliefconductorwidth=10 reliefentries=4 polygonreliefangle="90 Angle" airgapwidth=10
PolygonConnect PolygonConnect_15 [All vs IsNamedPolygon('NETC107_2_L01_P035')] p53: connectstyle=Direct reliefconductorwidth=10 reliefentries=4 polygonreliefangle="90 Angle" airgapwidth=10
PolygonConnect PolygonConnect_14 [All vs IsNamedPolygon('+48_L01_P023')] p54: connectstyle=Direct reliefconductorwidth=10 reliefentries=4 polygonreliefangle="90 Angle" airgapwidth=10
PolygonConnect PolygonConnect_13 [All vs IsNamedPolygon('NETC107_2_L01_P034')] p55: connectstyle=Direct reliefconductorwidth=10 reliefentries=4 polygonreliefangle="90 Angle" airgapwidth=10
PolygonConnect PolygonConnect_12 [All vs IsNamedPolygon('HS-3_L01_P032')] p56: connectstyle=Direct reliefconductorwidth=10 reliefentries=4 polygonreliefangle="90 Angle" airgapwidth=10
PolygonConnect PolygonConnect_11 [All vs IsNamedPolygon('HS-3_L01_P030')] p57: connectstyle=Direct reliefconductorwidth=10 reliefentries=4 polygonreliefangle="90 Angle" airgapwidth=10
PolygonConnect PolygonConnect_10 [All vs IsNamedPolygon('HS-3_L01_P028')] p58: connectstyle=Direct reliefconductorwidth=10 reliefentries=4 polygonreliefangle="90 Angle" airgapwidth=10
PolygonConnect PolygonConnect_9 [All vs IsNamedPolygon('GND_L01_P027')] p59: connectstyle=Direct reliefconductorwidth=10 reliefentries=4 polygonreliefangle="90 Angle" airgapwidth=10
PolygonConnect PolygonConnect_8 [All vs IsNamedPolygon('+48_L01_P023')] p60: connectstyle=Direct reliefconductorwidth=10 reliefentries=4 polygonreliefangle="90 Angle" airgapwidth=10
PolygonConnect PolygonConnect_7 [All vs IsNamedPolygon('NONET_L01_P024')] p61: connectstyle=Direct reliefconductorwidth=10 reliefentries=4 polygonreliefangle="90 Angle" airgapwidth=10
PolygonConnect PolygonConnect_6 [All vs IsNamedPolygon('+48_L01_P023')] p62: connectstyle=Direct reliefconductorwidth=10 reliefentries=4 polygonreliefangle="90 Angle" airgapwidth=10
PolygonConnect PolygonConnect_5 [All vs IsNamedPolygon('+48_L01_P022')] p63: connectstyle=Direct reliefconductorwidth=10 reliefentries=4 polygonreliefangle="90 Angle" airgapwidth=10
PolygonConnect PolygonConnect_4 [All vs IsNamedPolygon('GND_L06_P001')] p64: connectstyle=Direct reliefconductorwidth=10 reliefentries=4 polygonreliefangle="90 Angle" airgapwidth=10
PolygonConnect PolygonConnect_3 [All vs IsNamedPolygon('NETQ101_3_L01_P014')] p65: connectstyle=Direct reliefconductorwidth=10 reliefentries=4 polygonreliefangle="90 Angle" airgapwidth=10
PolygonConnect PolygonConnect_2 [All vs IsNamedPolygon('NETQ101_3_L01_P014')] p66: connectstyle=Direct reliefconductorwidth=10 reliefentries=4 polygonreliefangle="90 Angle" airgapwidth=10
PolygonConnect PolygonConnect_1 [All vs IsNamedPolygon('+48_L01_P000')] p67: connectstyle=Direct reliefconductorwidth=10 reliefentries=4 polygonreliefangle="90 Angle" airgapwidth=10
PolygonConnect [All] p68: connectstyle=Relief reliefconductorwidth=10 reliefentries=4 polygonreliefangle="90 Angle" airgapwidth=10
RoutingVias [All] p1: holewidth=28 width=50 viastyle="Through Hole" minholewidth=28 minwidth=50 maxholewidth=28 maxwidth=50
SilkToSolderMaskClearance [IsPad] p1: minsilkscreentomaskgap=7 clearancetoexposedcopper=TRUE
SolderMaskExpansion [All] p1: expansion=4 istentingtop=FALSE
SupplyNets "Schematic Supply Nets_2" [InNet('Shield')] p1: voltage=0.000
SupplyNets "Schematic Supply Nets_8" [InNet('+48')] p2: voltage=0.000
SupplyNets "Schematic Supply Nets_7" [InNet('+12')] p3: voltage=0.000
SupplyNets "Schematic Supply Nets_6" [InNet('GND')] p4: voltage=0.000
SupplyNets "Schematic Supply Nets_5" [InNet('+3V3')] p5: voltage=0.000
SupplyNets "Schematic Supply Nets_1" [InNet('+10D')] p6: voltage=0.000
SupplyNets "Schematic Supply Nets" [InNet('+10')] p7: voltage=0.000
Width [All] p1: maxlimit=300 minlimit=10 preferedwidth=39.37
27 further rules are at their usual default settings.

## Classes and differential pairs
channel class GateDriver: GateDriver1 GateDriver2 GateDriver3
channel class Current_Sensor: Current_Sensor1 Current_Sensor2 Current_Sensor3 Current_Sensor4
component class Pulse_generator: C401 C402 C403 C404 C405 C406 C407 D401 Q401 Q402 R402 R403 R404 U401 U402
component class main: 3 C101 C102 C103 C104 C105 C106 C107 C108 C109 C110 C111 C112 C113 C114 C116 C117 C118 C119 C120 C121 C122 C123 C124 C125 C126 C127 C128 L101 L102 L103 P101 P102 P103 P104 P105 P106 Q101 Q102 Q103 Q104 Q105 Q106 R101 R102 R103 R104 R105 R106 R107 R109 R112 R113 R114 R115 R116 R117 R118 R119 R120 R123 R124 R125 R126 R127 R128 R129 R130 R131 R132 R133 R134 R135 R136 R137 R138 R139 R140 R141 U101 U102 U103
component class GateDriver3: C301C C302C C303C D301C D302C D303C T301C U301C
component class GateDriver2: C301B C302B C303B D301B D302B D303B T301B U301B
component class GateDriver1: C301A C302A C303A D301A D302A D303A T301A U301A
component class Current_Sensor4: C201D U202D
component class Current_Sensor3: C201C U202C
component class Current_Sensor2: C201B U202B
component class Current_Sensor1: C201A U202A

## Components (designator, comment, footprint, x,y, rotation, side; value= is the part's Value field where it differs from the comment)
C101 "330U" CAPP300-600_AUT 1724.41,3944.88 r0 top
C102 "330U" CAPP300-600_AUT 1740.16,3204.72 r0 top
C103 "330U" CAPP300-600_AUT 1755.91,2448.82 r0 top
C104 "82U" CAP_1206 10027.56,5814.96 r90 top
C105 "68 uF" B32526R3686K000 9862.2,3515.75 r0 top
C106 "68 uF" B32526R3686K000 6830.71,3480.32 r0 top
C107 "68 uF" B32526R3686K000 4019.68,3468.5 r0 top
C108 "82U" CAP_1206 9681.1,1188.98 r0 top
C109 "82U" CAP_1206 6208.66,2385.83 r0 top
C110 "82U" CAP_1206 3303.15,2326.77 r0 top
C111 "1U" CAP_1206 2062.99,6157.48 r180 top
C112 "1U" CAP_1206 10153.54,2551.18 r90 top
C113 "1U" CAP_1206 7220.47,2539.37 r90 top
C114 "1U" CAP_1206 4293.82,2476.98 r90 top
C116 "100n" CAP_1206 9794.13,7266.11 r270 top
C117 "1u" CAP_1206 9681.1,7267.72 r270 top
C118 "100n" CAP_1206 9444.88,7287.4 r270 top
C119 "1u" CAP_1206 9547.24,7283.46 r270 top
C120 "680n" CAP_1206 7523.62,7035.43 r90 top
C121 "10u" CAP_1206 3783.46,6417.32 r90 top
C122 "100n" CAP_1206 3598.43,6413.39 r90 top
C123 "10u" CAP_1206 4680.86,6090.7 r90 top
C124 "100n" CAP_1206 4570.87,6090.55 r90 top
C125 "10u" CAP_1206 3759.84,7051.18 r90 top
C126 "100n" CAP_1206 3590.55,7043.31 r90 top
C127 "10u" CAP_1206 4653.54,6755.91 r90 top
C128 "100n" CAP_1206 4531.5,6755.91 r90 top
C201A "100n" CAP_1206 2255.91,6267.72 r90 top (schematic designator C201)
C201B "100n" CAP_1206 10314.96,2362.2 r0 top (schematic designator C201)
C201C "100n" CAP_1206 7456.69,2326.77 r0 top (schematic designator C201)
C201D "100n" CAP_1206 4543.31,2283.46 r0 top (schematic designator C201)
C301A "100n" CAP_1206 8090.55,3633.86 r180 top (schematic designator C301)
C301B "100n" CAP_1206 5346.46,3539.36 r180 top (schematic designator C301)
C301C "100n" CAP_1206 2499.36,3251.97 r180 top (schematic designator C301)
C302A "10u" CAP_1206 8095.67,3502.58 r180 top (schematic designator C302)
C302B "10u" CAP_1206 5346.46,3437.07 r180 top (schematic designator C302)
C302C "10u" CAP_1206 2500,3125.98 r180 top (schematic designator C302)
C303A "100n" RAD-0.2_AUT 8081.1,4334.65 r0 top (schematic designator C303)
C303B "100n" RAD-0.2_AUT 5251.97,4137.8 r0 top (schematic designator C303)
C303C "100n" RAD-0.2_AUT 2346.46,3948.82 r0 top (schematic designator C303)
C401 "10u" CAP_1206 2452.76,6433.07 r90 top
C402 "100n" CAP_1206 2625.98,6433.07 r90 top
C403 "1u" CAP_1206 3110.24,6862.2 r270 top
C404 "100n" CAP_1206 3220.47,6866.14 r270 top
C405 "100n" RAD-0.2_AUT 2421.26,7009.45 r270 top
C406 "470u" CAPP300-600_AUT 1404.72,6500 r180 top
C407 "470u" CAPP300-600_AUT 1693.7,7212.6 r0 top
D301A "1N4007" DIODE0.4_AUT 7799.21,3748.03 r90 top (schematic designator D301)
D301B "1N4007" DIODE0.4_AUT 5003.94,3665.35 r90 top (schematic designator D301)
D301C "1N4007" DIODE0.4_AUT 2106.3,3379.53 r90 top (schematic designator D301)
D302A "1N5819" DIODE0.4_AUT 7812.6,3047.24 r0 top (schematic designator D302)
D302B "1N5819" DIODE0.4_AUT 4938.58,2933.07 r0 top (schematic designator D302)
D302C "1N5819" DIODE0.4_AUT 2068.5,2870.08 r0 top (schematic designator D302)
D303A "1N5819" DIODE0.4_AUT 8357,2548 r90 top (schematic designator D303)
D303B "1N5819" DIODE0.4_AUT 5488,2409 r90 top (schematic designator D303)
D303C "1N5819" DIODE0.4_AUT 2614,2415 r90 top (schematic designator D303)
D401 "1N4007" DIODE0.4_AUT 2988.19,6740.16 r180 top
L101 "330u" 1140-331K-RC 9795,4914 r90 top
L102 "330u" 1140-331K-RC 6850,4910 r90 top
L103 "330u" 1140-331K-RC 3949,4900 r90 top
P101 "1217861-1" CONN_1217861-1_TEC 1401.57,5846.46 r0 top
P102 "1217861-1" CONN_1217861-1_TEC 1322.83,4716.54 r0 top
P103 "1217861-1" CONN_1217861-1_TEC 9787.4,2019.68 r0 top
P104 "1217861-1" CONN_1217861-1_TEC 6760.35,1998.94 r0 top
P105 "1217861-1" CONN_1217861-1_TEC 3976.38,1940.94 r180 top
P106 "HDR8X2" HDR2X8_AUT 5034.65,7460.63 r0 top
Q101 "MCTL80N20Y-TP" TOLL-8L 8409.79,4855.95 r90 top
Q102 "MCTL80N20Y-TP" TOLL-8L 8951.13,4134.89 r90 top
Q103 "MCTL80N20Y-TP" TOLL-8L 5486.56,4847.49 r90 top
Q104 "MCTL80N20Y-TP" TOLL-8L 5978.69,4182.13 r90 top
Q105 "MCTL80N20Y-TP" TOLL-8L 2736.56,4887.45 r90 top
Q106 "MCTL80N20Y-TP" TOLL-8L 3147.98,4111.27 r90 top
Q401 "IPP029N15NM6" TO-220V 2314.96,7535.43 r0 top
Q402 "IPP029N15NM6" TO-220V 3553.54,7539.37 r0 top
R101 "10m" WSL3673R_002-01 1788.48,5649.96 r0 top
R102 "1K8" RES_1206 9673.23,5811.02 r90 top
R103 "100R" RES_1206 9905.51,5921.26 r180 top
R104 "8K2" RES_1206 9909.45,5811.02 r180 top
R105 "10m" WSL3673R_002-01 9637.09,2835.06 r270 top
R106 "10m" WSL3673R_002-01 6694.51,2818.78 r270 top
R107 "10m" WSL3673R_002-01 3799.57,2756.1 r270 top
R109 "0R" RES_1206 9086.61,1948.82 r270 top
R112 "1K8" RES_1206 9685.04,1535.43 r0 top
R113 "8K2" RES_1206 9685.04,1303.15 r90 top
R114 "100R" RES_1206 9791.34,1307.09 r90 top
R115 "1K8" RES_1206 6212.6,2086.61 r0 top
R116 "8K2" RES_1206 6212.6,2291.34 r270 top
R117 "100R" RES_1206 6318.9,2287.4 r270 top
R118 "1K8" RES_1206 3307.09,2023.62 r0 top
R119 "8K2" RES_1206 3303.15,2228.35 r270 top
R120 "100R" RES_1206 3413.39,2228.35 r270 top
R123 "1K" RES_1206 9055.12,6826.77 r90 top
R124 "1K" RES_1206 9188.98,6826.77 r90 top
R125 "1K" RES_1206 8354.33,6822.83 r90 top
R126 "1K" RES_1206 8133.86,6822.83 r90 top
R127 "1K" RES_1206 9401.57,6826.77 r90 top
R128 "1K" RES_1206 9602.36,6826.77 r90 top
R129 "1K" RES_1206 7921.26,6822.83 r90 top
R130 "1K" RES_1206 7704.72,6818.9 r90 top
R131 "1K" RES_1206 8594.49,7350.39 r90 top
R132 "1K" RES_1206 8704.72,7350.39 r90 top
R133 "18K2" RES_1206 3775.59,6118.11 r0 top
R134 "1K8" RES_1206 3996.06,6232.28 r180 top
R135 "500R" 3296W 4273.23,6181.1 r180 top
R136 "18K2" RES_1206 3779.53,6740.16 r0 top
R137 "2K2" RES_1206 4007.87,6842.52 r180 top
R138 "500R" 3296W 4263.78,6811.02 r180 top
R139 "0R" RES_1206 9200.79,1948.82 r270 top
R140 "0R" RES_1206 9314.96,1948.82 r270 top
R141 "0R" RES_1206 10366.14,1110.24 r180 top
R402 "18K2" RES_1206 2720.47,6094.49 r0 top
R403 "2K2" RES_1206 2944.88,6212.6 r180 top
R404 "500R" 3296W 3206.3,6204.72 r180 top
T301A "78602/9C" DIP6W_AUT 8266.02,2940.84 r180 top (schematic designator T301)
T301B "78602/9C" DIP6W_AUT 5384.13,2777.85 r180 top (schematic designator T301)
T301C "78602/9C" DIP6W_AUT 2521.93,2799.11 r180 top (schematic designator T301)
U101 "AD7328BRUZ" TSSOP20_44 8491.72,6975.87 r0 top
U102 "LR12K4-G" "D PAK (TO-252-3)" 3826.11,6599.24 r270 top
U103 "LR12K4-G" "D PAK (TO-252-3)" 3838.9,7233.74 r270 top
U202A "INA241A3IDR" SOIC8_M 2185.2,6466.26 r180 top (schematic designator U202)
U202B "INA241A3IDR" SOIC8_M 10483.19,2417.17 r90 top (schematic designator U202)
U202C "INA241A3IDR" SOIC8_M 7643.43,2393.54 r90 top (schematic designator U202)
U202D "INA241A3IDR" SOIC8_M 4720.47,2346.46 r90 top (schematic designator U202)
U301A "IR2101-ND" DIP8-AUT 7903.94,3746.94 r0 top (schematic designator U301)
U301B "IR2101-ND" DIP8-AUT 5072.76,3616.06 r0 top (schematic designator U301)
U301C "IR2101-ND" DIP8-AUT 2168.82,3371.97 r0 top (schematic designator U301)
U401 "LR12K4-G" "D PAK (TO-252-3)" 2775.91,6622.72 r270 top
U402 "IR2101" DIP8_AUT 2961.45,7256.94 r180 top

## Footprints (in the part's own frame and the unit in brackets; to place one, negate y for a bottom-side part, rotate by r counter-clockwise, add the part's x,y. Pads: shape width x height; smd on the part's side, far side on the other; paste and mask are expansions set on the pad)
1140-331K-RC [mil] "Lead Spacing = 1.15 in / 1140-331K-RC"
  round 88.31 hole 58.87: 1(-575,0) 2(575,0)
  round 96.5 hole 193 unplated: 3(0,0)
  silkscreen extent -795,-750 750,750, body extent -745,-750 755,750, height 1031
3296W [mil] "3296 - 3/8 ” Square Trimpot, Trimming Potentiometer"
  round 70 hole 25: 1(100,0) 2(-100,0) W(0,0)
  silkscreen extent -197,-95 197,95, body extent -189,-96 186,94, height 458
B32526R3686K000 [mil] "Lead Spacing 1.476\" (37.50mm)"
  rect 71x71 / inner round 60 / far side rect 71x71 hole 51 paste-99999 mask+0: 1(-740,-30)
  round 71 / inner round 60 / far side round 71 hole 51 paste-99999 mask-35.5: 2(736.38,-30)
  silkscreen extent -834,-586 830,526, body extent -827,-582 827,520, height 1673
CAP_1206 [mm] "Body 3.2 x 1.6 mm (LxW typ)"
  rect 1.6x1.8 smd: 1(0,0) 2(2.8,0)
  silkscreen extent 1.1,-0.8 1.7,0.8, body extent -0.15,-0.81 3.05,0.79, height 1.6
CAPP300-600_AUT [mil] "Capacitor, Electrolytic, Radial, Snap-In Pins; Pin Spacing 300 mil; Body 600mil (Dia)"
  rect 100x100 hole 40: 1(0,0)
  round 100 hole 40: 2(-300,0)
  silkscreen extent -450,-300 204,300, body extent -449,-302 153,300, height 599
CONN_1217861-1_TEC [mil] "Pitch = 200 Mil / pad hole size = 77 mil"
  round 77 / inner round 60 / far side round 77 hole 57 paste-99999 mask+0: 1(-95,5) 2(105,5)
  silkscreen extent -196,-62 166,72
"D PAK (TO-252-3)" [mm] "D-PAK,  Body 6.1x6.5mm, Pitch 2.28mm, Lead Span 9.7mm"
  rect 0.95x1.9 smd: 1(1.657,1.492) 3(6.217,1.492)
  rect 6.8x6.9 smd: 2(3.937,7.692)
  silkscreen extent 0.51,1.37 7.29,3.84, body extent 0.64,0.98 7.18,10.92, height 2.34
DIODE0.4_AUT [mil] "Diode, Axial; Body 5.2 x 2.7 mm (LxDia. max), Pin Distance, 400mil"
  rect 80x80 hole 40: A(0,0)
  round 80 hole 40: K(400,0)
  silkscreen extent 40,-50 360,50, body extent -18,-54 416,53, height 107
DIP6W_AUT [mil] "Wide DIL transformer"
  rect 100x62 hole 32: 1(50,281)
  oval 100x62 hole 32: 2(50,181) 3(50,81) 4(455,81) 5(455,181) 6(455,281)
  silkscreen extent 110,11 395,361
DIP8-AUT [mil] "DIP; 8 Leads; Row Spacing 7.62 mm; Pitch 2.54 mm; For AUT Manufacture"
  rect 62x100 hole 32: 1(80,80)
  oval 62x100 hole 32: 2(180,80) 3(280,80) 4(380,80) 5(380,380) 6(280,380) 7(180,380) 8(80,380)
  silkscreen extent 30,130 430,330, body extent 10,80 440,390, height 200
DIP8_AUT [mil] "DIP8 100mil pitch, 300mil row."
  rect 96x62 hole 32: 1(52,353)
  oval 96x62 hole 32: 2(52,253) 3(52,153) 4(52,53) 5(352,53) 6(352,153) 7(352,253) 8(352,353)
  silkscreen extent 102,3 302,403, body extent 47,-7 357,423, height 200
HDR2X8_AUT [mil] "Connector; Header; 8x2 Position"
  rect 80x80 hole 35.43: 1(0,0)
  round 80 hole 35.43: 2(0,100) 3(100,0) 4(100,100) 5(200,0) 6(200,100) 7(300,0) 8(300,100) 9(400,0) 10(400,100) 11(500,0) 12(500,100) 13(600,0) 14(600,100) 15(700,0) 16(700,100)
  silkscreen extent -50,-50 750,150, body extent -50,-50 750,150, height 398
RAD-0.2_AUT [mil] "Indicating Instrument; 2 Leads; Distance 200mil"
  rect 80x80 hole 40: 1(-100,0)
  round 80 hole 40: 2(100,0)
  silkscreen extent -175,-75 175,75, body extent -175,-75 175,75, height 310
RES_1206 [mm] "Body 3.2 x 1.6 mm (LxW typ)"
  rect 1.6x1.8 smd: 1(0,0) 2(2.8,0)
  silkscreen extent 1.14,-0.8 1.65,0.8, body extent -0.21,-0.8 2.96,0.75, height 0.6
SOIC8_M [mm] "SOIC8 General medium width 3-5 mm"
  oval 2.8x0.7 smd: 1(1.904,4.913) 2(1.904,3.643) 3(1.904,2.373) 4(1.904,1.103) 5(7.004,1.103) 6(7.004,2.373) 7(7.004,3.643) 8(7.004,4.913)
  silkscreen extent 1.33,0.51 5.25,6.12, body extent 1.39,0.56 7.52,5.45, height 1.76
TO-220V [mil] "TO, Thru-Hole, Transistor, Vertical, Heatsink Mounted; 3 In-Line Leads; Pitch 2.54 mm"
  oval 75x125 hole 40: 1(-100,0) 2(0,0) 3(100,0)
  silkscreen extent -180,-80 180,100, body extent -204,-59 204,110, height 762
TOLL-8L [mm] "TOLL-8L"
  rect 2.8x0.8 smd paste-2: 1(1.659,9.509)
  rect 0.4x0.4 smd paste-1 mask+0: 2(2.659,5.309)
  rect 0.5x0.5 smd paste-1 mask+0: 3(10.574,5.359)
  Top Layer region: 3.059,0.709 0.259,0.709 0.259,1.509 2.259,1.509 2.259,1.909 0.259,1.909 0.259,2.709 2.259,2.709 2.259,3.109 0.259,3.109 0.259,3.909 2.259,3.909 2.259,4.309 0.259,4.309 0.259,5.109 2.259,5.109 2.259,5.509 0.259,5.509 0.259,6.309 2.259,6.309 2.259,6.709 0.259,6.709 0.259,7.509 2.259,7.509 2.259,7.909 0.259,7.909 0.259,8.709 3.059,8.709
  Top Layer region: 13.559,0.259 12.159,0.259 12.159,0.959 9.259,0.959 9.259,0.459 5.559,0.459 5.559,10.159 9.259,10.159 9.259,9.659 12.159,9.659 12.159,10.359 13.559,10.359
  silkscreen extent -0.99,0.36 11.84,10.46, body extent 1.07,0.36 12.75,10.26, height 2.4
TSSOP20_44 [mil] "TSSOP20 4.4mm SMD DIL"
  round 30 on Top Overlay mask+2.01: 1(19,307)
  rect 70x14 smd paste+0 mask+0: 1(44,272.16) 2(44,246.57) 3(44,220.98) 4(44,195.39) 5(44,169.8) 6(44,144.2) 7(44,118.61) 8(44,93.02) 9(44,67.43) 10(44,41.84) 11(276,41.84) 12(276,67.43) 13(276,93.02) 14(276,118.61) 15(276,144.2) 16(276,169.8) 17(276,195.39) 18(276,220.98) 19(276,246.57) 20(276,272.16)
  silkscreen extent 70,22 250,293, body extent 34,27 286,287, height 47
WSL3673R_002-01 [mil] "Kelvin 4W current Shunt"
  rect 116x300 smd mask+2.01: 1(75,165) 4(369,165)
  rect 116x66 smd mask+2.01: 2(75,372) 3(369,372)
  silkscreen extent 5,5 435,415

## Part data
C101 C102 C103 C406 C407: library part CAPP300-600, "Polarized Aluminum Capacitor, Through Hole, Pitch 300mil, Body 600mil (Dia)"
C104 C108 C109 C110 C111 C112 C113 C114 C116 C117 C118 C119 C120 C121 C122 C123 C124 C125 C126 C127 C128 C201A C201B C201C C201D C301A C301B C301C C302A C302B C302C C401 C402 C403 C404: library part "CAPN 1206", "Non Polarized Capacitor, SMD, 1206"
C105 C106 C107: library part B32526R3686K000, "68 µF Film Capacitor 160V 250V Polyester, Polyethylene Terephthalate (PET), Metallized Radial /  / https://www.digikey.co.nz/en/products/detail/epcos-tdk-electronics/B32526R3686K000/3490213", ComponentLink1Description="New link", ComponentLink1URL=https://www.digikey.co.nz/en/products/detail/epcos-tdk-electronics/B32526R3686K000/3490213
C303A C303B C303C C405: library part "CAPN RAD0.2", "Non Polarized Capacitor, Multilayer Ceramic Dipped Radial, Pitch 200mil"
D301A D301B D301C D401: "Diode, Standard, 1A, 1000v", Supplier Part Number 1=9549129, Supplier 1=Farnell
D302A D302B D302C D303A D303B D303C: "Schottky Diode, 1A,40v", Supplier Part Number 1=1017589, Supplier 1=Farnell
L101 L102 L103: library part 1140-331K-RC, "Power Inductors - Leaded 330uH 10% /  / https://nz.mouser.com/ProductDetail/Bourns/1140-331K-RC?qs=wiQ7G1Lt8gwP8A01VI%2FcoA%3D%3D", ComponentLink1Description="New link", ComponentLink1URL=https://nz.mouser.com/ProductDetail/Bourns/1140-331K-RC?qs=wiQ7G1Lt8gwP8A01VI%2FcoA%3D%3D
P101 P102 P103 P104 P105: "250 FASTON,PCB TAB,TCBR / https://tinyurl.com/5c2arff3 /  / https://www.digikey.co.nz/en/products/detail/te-connectivity-amp-connectors/1217861-1/2233479?_gl=1*5eokag*_up*MQ..*_gs*MQ..&gclid=EAIaIQobChMI8b7VmffHjwMVDh6DAx24XBEhEAAYASAAEgLCEPD_BwE&gclsrc=aw.ds&gbraid=0AAAAADrbLlg332VqylSF3zuB8x7hQ-0VQ"
P106: "Header, 8-Pin, Dual row, 2.54mm Pitch, Straight", Supplier Part Number 1=9733620, Supplier 1=Farnell
Q101 Q102 Q103 Q104 Q105 Q106: "N-Channel 200 V 80A (Tc) 250W (Tj) Surface Mount TOLL-8L"
Q401: library part FQP65N06, "Insulated-Gate Field-Effect Transistor (IGFET), N-Channel, Enhancement, Body Diode, Pin 1 Gate, 2 Drain, 3 Source, 3 Pins- Through Hole TO-220-3"
Q402: library part FQP65N06, "Insulated-Gate Field-Effect Transistor (IGFET), N-Channel, Enhancement, Body Diode, Pin 1 Gate, 2 Drain, 3 Source, 3 Pins - Through Hole TO-220-3"
R101 R105 R106 R107: library part WSL3673R-01, "Current Shunt  / Kelvin 4W 0.002- 0.01"
R102 R103 R104 R109 R112 R113 R114 R115 R116 R117 R118 R119 R120 R123 R124 R125 R126 R127 R128 R129 R130 R131 R132 R133 R134 R136 R137 R139 R140 R141 R402 R403: library part "Resistor 1206", "Resistor, SMD, 1206"
R135 R138 R404: library part 3296W-1-104LF, "3296W Series, 3/8 ” Square Potentiometer, 100k, 10%,  0.5 Watts, Multi Turn /  / Part #: PV36W501C01B00", Supplier Part Number 1=9353194, Supplier 1=Farnell
T301A T301B T301C: "Pulse transformer 1:1:1"
U101: "ADC 12 Bit / Package TSSOP20"
U102 U103 U401: "Adj Positive Regulator  / Linear. 12V dropout V.  / 2W"
U202A U202B U202C U202D: "Current Sense Amp"
U301A U301B U301C: "Half-Bridge Gate Driver IC Non-Inverting 8-PDIP"
U402: library part IR2101_DIP, "Half - Bridge Driver, MOSFET/IGBT, DIP8", Supplier Part Number 1=8638829, Supplier 1=Farnell

## Free pads (board coordinates)
  round 196.85 hole 118.11: 1(1148.34,7397.62) 1(1150.43,1601.43) 3(10804.77,7404.33) 4(10811.02,1610.02)

## Via types
v1: diameter 50, hole 28, Top Layer to Bottom Layer, 361 vias
v2: diameter 50, hole 15, Top Layer to Bottom Layer, 264 vias
v3: diameter 50, hole 30, Top Layer to Bottom Layer, 41 vias